# EAGLE board 1hp_blank (EAGLE 7.7.0)

Size 5.08 x 128.5 mm. Coordinates in mm from the lower left corner, seen from the top.
Copper layers (1*16): Top 0.035mm / dielectric 1.5mm / Bottom 0.035mm
Design rules "default": minimum track width 10mil, minimum drill 24mil, track to track 8mil, track to pad 8mil, pad to pad 8mil, via to via 8mil, smd to smd 8mil, copper to edge 40mil, drill to drill 8mil, minimum pad ring 10mil, minimum via ring 8mil, stop-mask expansion 4mil, vias tented up to drill 0mil, thermal gap 10mil

## Footprints (pad centres in the part's own frame; a part is rotated, then mirrored left to right if it is on the bottom)
EURORACK1HPPANEL = hole 3.2: 2.42,3; 2.42,125.5

## Placement (x,y rotation side)
U$1  EURORACK_PANEL1HP  [EURORACK1HPPANEL]  0,0 0 top

## Library data of the parts
U$1 = EurorackModularParts